# Altium PCB PCB1.PcbDoc
Units mm, origin at the board's own origin, x right, y up, seen from the top; angles counter-clockwise.
Board outline 43.18 x 67.82 mm, 2 copper layers (Top Layer, Bottom Layer); 45 components, 24 nets, 112 pads, 7 vias.
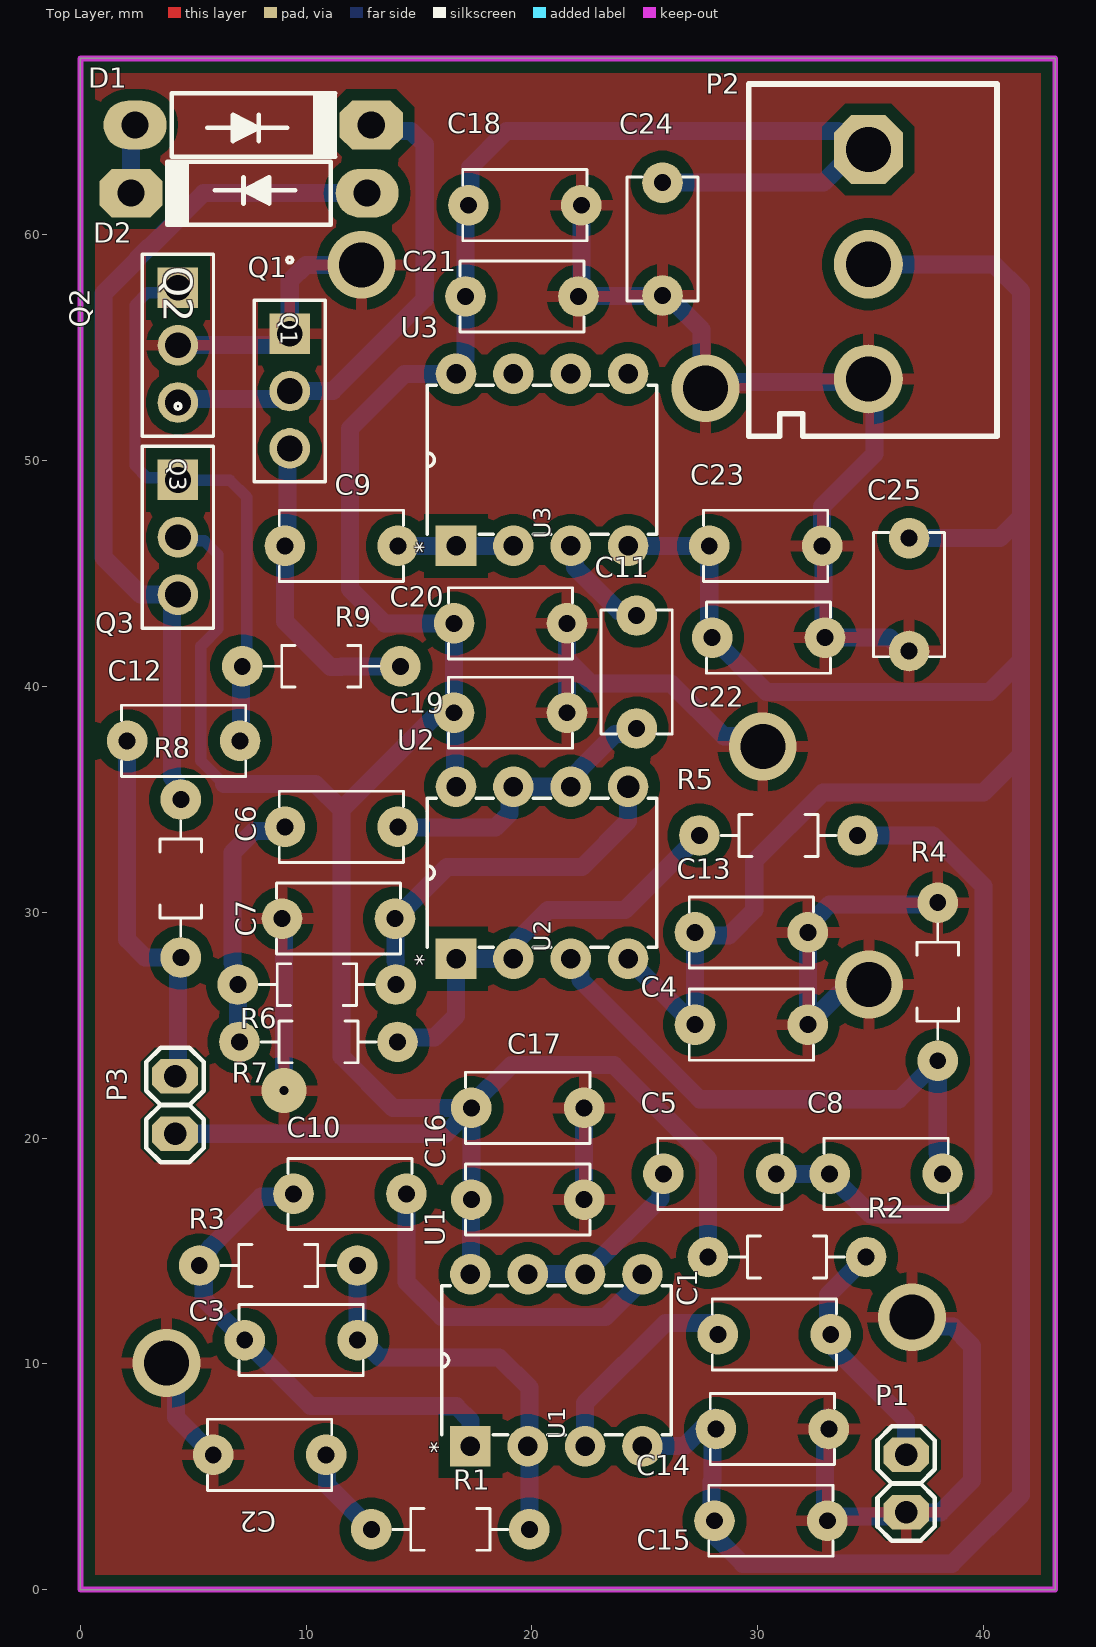
[diagram p0: Top Layer view]
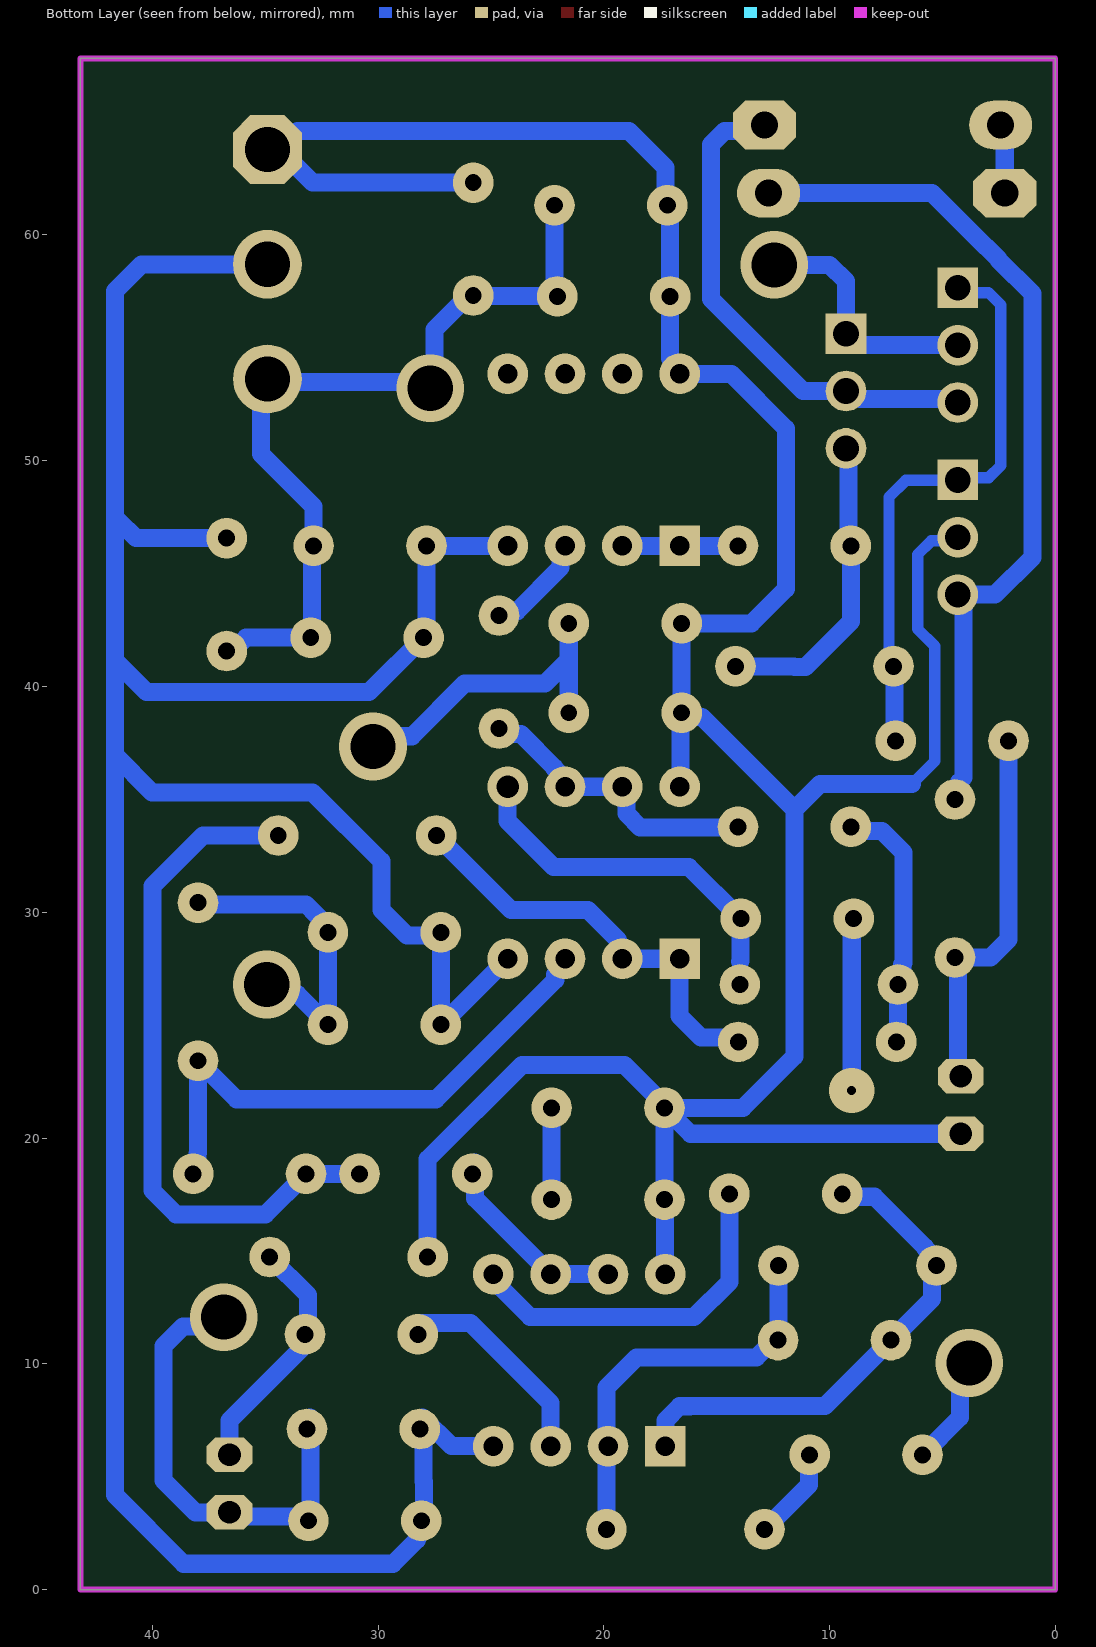
[diagram p1: Bottom Layer view, seen from below]

## Layer stack, top to bottom
Top Solder: solder mask 0.0102, Solder Resist, Dk 3.5
Top Layer: signal copper 0.0356
Dielectric 1: dielectric 0.32, FR-4, Dk 4.8
Bottom Layer: signal copper 0.0356
Bottom Solder: solder mask 0.0102, Solder Resist, Dk 3.5

## Board outline
0,0 0,67.818 43.18,67.818 43.18,0

## Design rules (kind name [scope] priority, off if disabled: settings)
Clearance Clearance_2 [InNamedPolygon('GND_POUR')] p1: gap=0.5 ignorepadtopadclearanceinfootprint=FALSE
Clearance [All] p2: gap=0.508 ignorepadtopadclearanceinfootprint=FALSE
PolygonConnect PolygonConnect_1 [All] p1: thpad.connectstyle=Relief thpad.reliefconductorwidth=0.5 thpad.reliefentries=4 thpad.polygonreliefangle="90 Angle" thpad.airgapwidth=0.5 smdpad.connectstyle=Relief smdpad.reliefconductorwidth=0.254 smdpad.reliefentries=4 smdpad.polygonreliefangle="90 Angle" smdpad.airgapwidth=0.254 via.connectstyle=Relief via.reliefconductorwidth=0.5 via.reliefentries=4 via.polygonreliefangle="90 Angle" via.airgapwidth=0.5
PolygonConnect [All] p2: connectstyle=Relief reliefconductorwidth=0.254 reliefentries=4 polygonreliefangle="90 Angle" airgapwidth=0.254
RoutingVias [All] p1: holewidth=0.711 width=1.27 viastyle="Through Hole" minholewidth=0.711 minwidth=1.27 maxholewidth=0.711 maxwidth=1.27
SolderMaskExpansion [All] p1: expansion=0.102 istentingtop=FALSE
SupplyNets "Schematic Supply Nets_2" [InNet('-12')] p1: voltage=0.000
SupplyNets "Schematic Supply Nets_1" [InNet('+12')] p2: voltage=0.000
SupplyNets "Schematic Supply Nets" [InNet('GND')] p3: voltage=0.000
Width [All] p1: maxlimit=1 minlimit=0.254 preferedwidth=0.508
30 further rules are at their usual default settings.

## Components (designator, comment, footprint, x,y, rotation, side; value= is the part's Value field where it differs from the comment)
C1 "Capacitor" CAP_RDE5C1H104J2K1H03B 30.734,11.303 r180 top value=10u
C2 "Capacitor" CAP_RDE5C1H104J2K1H03B 8.382,5.969 r0 top value=100u
C3 "Capacitor" CAP_RDE5C1H104J2K1H03B 9.779,11.049 r180 top value=100p
C4 "Capacitor" CAP_RDE5C1H104J2K1H03B 29.718,25.019 r0 top value=1u
C5 "Capacitor" CAP_RDE5C1H104J2K1H03B 28.321,18.415 r0 top value=1u
C6 "Capacitor" CAP_RDE5C1H104J2K1H03B 11.557,33.782 r0 top value=110n
C7 "Capacitor" CAP_RDE5C1H104J2K1H03B 11.43,29.718 r0 top value=56n
C8 "Capacitor" CAP_RDE5C1H104J2K1H03B 35.687,18.415 r0 top value=1u
C9 "Capacitor" CAP_RDE5C1H104J2K1H03B 11.557,46.228 r0 top value=47u
C10 "Capacitor" CAP_RDE5C1H104J2K1H03B 11.938,17.526 r180 top value=1u
C11 "Capacitor" CAP_RDE5C1H104J2K1H03B 24.638,40.64 r270 top value=2.2u
C12 "Capacitor" CAP_RDE5C1H104J2K1H03B 4.572,37.592 r180 top value=220u
C13 "Capacitor" CAP_RDE5C1H104J2K1H03B 29.718,29.108 r0 top value=1u
C14 "Capacitor" CAP_RDE5C1H104J2K1H03B 30.647,7.112 r180 top value=1u
C15 "Capacitor" CAP_RDE5C1H104J2K1H03B 30.582,3.048 r180 top value=1u
C16 "Capacitor" CAP_RDE5C1H104J2K1H03B 19.812,17.272 r180 top value=1u
C17 "Capacitor" CAP_RDE5C1H104J2K1H03B 19.812,21.336 r180 top value=1u
C18 "Capacitor" CAP_RDE5C1H104J2K1H03B 19.685,61.316 r180 top value=1u
C19 "Capacitor" CAP_RDE5C1H104J2K1H03B 19.05,38.837 r180 top value=1u
C20 "Capacitor" CAP_RDE5C1H104J2K1H03B 19.05,42.799 r180 top value=1u
C21 "Capacitor" CAP_RDE5C1H104J2K1H03B 19.558,57.277 r180 top value=1u
C22 "Capacitor" CAP_RDE5C1H104J2K1H03B 30.48,42.164 r180 top value=1u
C23 "Capacitor" CAP_RDE5C1H104J2K1H03B 30.353,46.228 r180 top value=1u
C24 "Capacitor" CAP_RDE5C1H104J2K1H03B 25.781,59.817 r270 top value=1u
C25 "Capacitor" CAP_RDE5C1H104J2K1H03B 36.703,44.069 r90 top value=1u
D1 "1N4007" My_DO41 7.62,64.77 r180 top
D2 "1N4007" My_DO41 7.5,61.951 r0 top
P1 "Header 2" My_1X02 36.576,3.429 r270 top
P2 "Header 3" My_CN3 34.912,58.661 r270 top
P3 "Header 2" My_1X02 4.191,20.193 r270 top
Q1 "BD139G" SOT-32_STM 9.271,55.626 r270 top
Q2 "BD14016STU" SOT-32_STM 4.318,57.658 r270 top
Q3 "BD139G" SOT-32_STM 4.318,49.149 r270 top
R1 "Resistor" RESAD700W45L350D185 16.383,2.667 r0 top value=1K
R2 "Resistor" RESAD700W45L350D185 31.298,14.732 r0 top value=10K
R3 "Resistor" RESAD700W45L350D185 8.763,14.351 r180 top value=100K
R4 "Resistor" RESAD700W45L350D185 37.973,26.924 r90 top value=22K
R5 "Resistor" RESAD700W45L350D185 30.917,33.401 r180 top value=10K
R6 "Resistor" RESAD700W45L350D185 10.47,26.797 r0 top value=10K
R7 "Resistor" RESAD700W45L350D185 10.541,24.257 r180 top value=10K
R8 "Resistor" RESAD700W45L350D185 4.445,31.496 r90 top value=1.2K
R9 "Resistor" RESAD700W45L350D185 10.668,40.894 r180 top value=100K
U1 "NE5532ANG" P8#1 24.892,13.97 r90 top
U2 "NE5532ANG" P8#2 24.257,35.56 r90 top
U3 "NE5532ANG" P8#1 24.257,53.848 r90 top

## Footprints (in the part's own frame and the unit in brackets; to place one, negate y for a bottom-side part, rotate by r counter-clockwise, add the part's x,y. Pads: shape width x height; smd on the part's side, far side on the other; paste and mask are expansions set on the pad)
CAP_RDE5C1H104J2K1H03B [mm]
  round 1.8 hole 0.75: 1(-2.5,0) 2(2.5,0)
  silkscreen extent -2.75,-1.58 2.75,1.58
My_1X02 [mil]
  oct 60x80 hole 39.37: 1(-100,0) 2(0,0)
  silkscreen extent -150,-50 50,50, body extent -150,-51 46,47, height 323
My_CN3 [mil]
  oct 120x120 hole 78.74: 1(-201.5,-0.5)
  round 120 hole 78.74: 2(-1.5,-0.5) 3(198.5,-0.5)
  silkscreen extent -316,-209 299,224, body extent -320,-214 302,227, height 721
My_DO41 [mil]
  oval 110x85 hole 47.24: A(204.71,-4)
  oct 110x85 hole 47.24: K(-207.1,-4)
  silkscreen extent -148,-59 141,51, body extent -228,-53 228,45, height 104
P8#1 [mm]
  rect 1.8x1.8 hole 0.864 paste-2539.97 mask-0.686: 1(-7.62,7.62)
  round 1.8 hole 0.864 paste-2539.97 mask-0.686: 2(-7.62,5.08) 3(-7.62,2.54) 4(-7.62,0) 5(0,0) 6(0,2.54) 7(0,5.08) 8(0,7.62)
  silkscreen extent -7.11,-1.27 -0.51,8.89, body extent -7.75,-1.27 0.38,8.89, height 5.21
P8#2 [mm]
  rect 1.8x1.8 hole 0.864 paste-2539.97 mask-0.686: 1(-7.62,7.62)
  round 1.8 hole 0.864 paste-2539.97 mask-0.686: 2(-7.62,5.08) 3(-7.62,2.54) 4(-7.62,0) 6(0,2.54) 7(0,5.08) 8(0,7.62)
  round 1.8 hole 1 paste-2539.97 mask-0.686: 5(0,0)
  silkscreen extent -7.11,-1.27 -0.51,8.89, body extent -7.75,-1.27 0.38,8.89, height 5.21
RESAD700W45L350D185 [mm]
  round 1.8 hole 0.75: 1(-3.5,0) 2(3.5,0)
  silkscreen extent -2.55,-0.92 2.55,0.92, body extent -3.72,-0.92 3.72,0.92, height 1.84
SOT-32_STM [mm]
  rect 1.8x1.8 hole 1.143 paste-2539.97 mask+0: 1(0,0)
  round 1.8 hole 1.143 paste-2539.97 mask+0: 2(2.54,0) 3(5.08,0)
  silkscreen extent -3.39,-1.57 6.57,1.57, body extent -1.36,-1.45 6.44,1.45, height 8.89

## Part data
D1 D2: "1 Amp Diode", ASiD Part Number=1n4007-AS
P1 P3: "Header, 2-Pin", ASiD Part Number="Header 2-AS"
P2: "Header, 3-Pin", ASiD Part Number="Header 3-AS"
Q1 Q2 Q3 U1 U2 U3: "No Description Available", Manufacturer_Name=onsemi, Copyright="Copyright (C) 2026 Ultra Librarian. All rights reserved."
  Q1 Q3: Manufacturer_Part_Number=BD139G
  Q2: Manufacturer_Part_Number=BD14016STU
  U1 U2 U3: Manufacturer_Part_Number=NE5532ANG, RefDes=RefDes, Type=Type
C1 C2 C3 C4 C5 C6 C7 C8 C9 C10 C11 C12 C13 C14 C15 C16 C17 C18 C19 C20 C21 C22 C23 C24 C25: SimulationGenericComponent=True
R1 R2 R3 R4 R5 R6 R7 R8 R9: SimulationGenericComponent=True, TC1=0, TC2=0

## Via types
v1: diameter 3, hole 2, Top Layer to Bottom Layer, 6 vias
v2: diameter 2, hole 0.4, Top Layer to Bottom Layer, 1 vias

## Nets (pads, with @x,y where several pads share a name; then routed paths per layer and width w, separated by ;. In a path a pad name is that pad's centre, name@x,y a point inside that pad or via, vN(x,y) a via of type N, cw(c..) or ccw(c..) an arc to the next point about the centre after c; other vN are vias at no path point)
+12: C16.2 C17.2 C18.2 C19.2 C20.2 C21.2 C24.1 P2.1 P3.2 Q3.2 R2.1 U1.8 U2.8 U3.8 | length 143.9
  Bottom Layer w0.5: Q3.2 4.477,46.45 5.493,46.45 6.096,45.847 6.096,42.545 5.334,41.783 5.334,36.703 6.35,35.687
  Bottom Layer w0.8: P3.2@4.195,20.189 16.165,20.189 C17.2 ; 6.35,35.687 10.414,35.687 11.557,34.544 ; U2.8@16.593,35.604 16.593,38.793 C19.2 ; C17.2@17.215,21.366 19.09,23.241 23.622,23.241 27.798,19.065 R2.1 ; U1.8 17.292,13.99 C16.2@17.292,17.252 ; C16.2 C17.2 ; C24.1@25.4,62.317 C24.1 32.91,62.317 34.372,63.779 P2.1 ; P2.1@34.081,64.598 33.859,64.376 33.776,64.376 33.554,64.598 18.878,64.598 17.266,62.986 17.266,61.396 C18.2 17.058,61.189 C21.2 17.058,54.54 16.637,54.119 U3.8 14.351,53.848 11.938,51.435 11.938,44.323 13.462,42.799 C20.2 C19.2 ; 11.557,34.544 15.658,38.645 16.359,38.645 C19.2 ; 11.557,34.544 11.557,23.622 13.843,21.336 C17.2
-12: C4.1 C13.1 C14.2 C15.2 C22.2 C23.2 C25.2 P2.2 U1.4 U2.4 U3.4 | length 139.5
  Bottom Layer w0.8: U2.4 26.688,25.509 C4.1@27.218,25.509 ; U3.4 24.27,46.215 C23.2@27.853,46.215 ; U1.4 26.75,6.35 C14.2@28.02,7.62 ; C4.1 C4.1@27.218,25.509 ; C23.2 C23.2@27.853,46.215 ; C15.2@27.955,3.556 27.955,4.779 27.987,4.779 C14.2@27.987,7.587 ; C15.2 28.273,2.857 28.273,2.207 29.337,1.143 38.608,1.143 41.656,4.191 41.656,36.957 ; P2.2 40.469,58.699 41.656,57.513 41.656,47.371 41.656,41.148 ; C25.2 40.727,46.569 41.529,47.371 ; C4.1@27.218,25.509 C13.1 27.351,28.975 28.721,28.975 29.845,30.099 29.845,32.258 32.893,35.306 40.005,35.306 41.656,36.957 ; C23.2@27.853,46.215 27.853,42.291 30.393,39.751 40.259,39.751 41.656,41.148 ; 41.656,36.957 41.656,41.148
GND: C2.1 C4.2 C7.1 C13.2 C14.1 C15.1 C16.1 C17.1 C18.1 C19.1 C20.1 C21.1 C22.1 C23.1 C24.2 C25.1 P1.2 P2.3 Q1.1 Q2.2 R4.2 | length 114.2
  Bottom Layer w0.8: v1(3.81,10.033) 4.231,9.612 4.231,7.62 C2.1 ; Q2.2 8.763,55.118 Q1.1 9.271,57.951 9.994,58.674 v1(12.446,58.674) ; C7.1 9.017,29.631 v2(9.017,22.098) ; C19.1 21.55,41.188 ; C20.1 21.55,41.188 ; C21.1 22.185,57.404 C18.1 ; C16.1@22.185,17.272 C16.1@22.185,17.574 ; C21.1@22.185,57.297 25.38,57.297 25.39,57.307 C24.2@25.41,57.307 ; C16.1 C17.1 ; C24.2@25.4,57.317 25.995,57.317 27.504,55.808 27.504,53.395 v1(27.686,53.213) 27.953,53.48 34.658,53.48 34.849,53.67 P2.3 35.179,53.34 35.179,50.292 32.853,47.966 C23.1 ; v1(30.226,37.338) 29.77,37.794 28.5,37.794 26.162,40.132 22.606,40.132 21.55,41.188 ; C23.1@32.766,46.315 C23.1 ; C15.1@32.987,3.589 32.987,7.587 C14.1@33.02,7.62 ; C15.1 33.273,3.239 P1.2@36.386,3.239 ; v1@35.593,26.67 35.299,26.376 33.575,26.376 C4.2 32.218,29.551 32.39,29.551 32.718,29.879 32.718,29.884 33.187,30.353 R4.2@38.416,30.353 ; P1.2 36.591,3.414 38.085,3.414 39.497,4.826 39.497,10.795 38.638,11.654 37.241,11.654 v1(36.83,12.065) ; C25.1 36.432,41.569 35.837,42.164 C22.1 32.917,42.227 32.917,46.164 C23.1
  other v1: 34.925,26.797
NetC1_1: C1.1 P1.1 R2.2 | length 10.9
  Bottom Layer w0.8: R2.2 33.107,13.041 33.107,11.765 33.252,11.62 33.298,11.62 33.298,10.771 36.576,7.493 P1.1
NetC1_2: C1.2 U1.3 | length 9.1
  Bottom Layer w0.8: U1.3 22.352,8.255 25.908,11.811 C1.2@28.107,11.811
NetC2_2: C2.2 R1.1 | length 4.1
  Bottom Layer w0.8: C2.2 10.916,5.935 10.916,4.634 R1.1
NetC3_1: C3.1 R1.2 R3.1 U1.2 | length 18
  Bottom Layer w0.8: C3.1@12.263,11.065 R3.1 ; C3.1 12.486,11.049 13.248,10.287 18.542,10.287 19.883,8.946 R1.2
NetC3_2: C3.2 C10.2 R3.2 U1.1 | length 22.3
  Bottom Layer w0.8: C10.2@9.305,17.663 9.04,17.399 8.001,17.399 5.763,15.161 5.763,15.122 5.263,14.622 5.263,14.08 5.461,13.882 5.461,12.867 10.2,8.128 16.176,8.128 16.184,8.12 16.645,8.12 17.272,7.493 U1.1
NetC5_1: C5.1 U1.6 U1.7 | length 8.9
  Bottom Layer w0.8: U1.7 U1.6 22.352,13.987 25.694,17.329 C5.1@25.694,18.923
NetC5_2: C5.2 C8.1 R5.1 | length 30.6
  Bottom Layer w0.8: C5.2 C8.1 34.995,16.607 38.936,16.607 39.995,17.666 39.995,31.164 37.758,33.401 R5.1 R5.1@34.168,33.401
NetC6_1: C6.1 R6.1 R7.2 | length 11
  Bottom Layer w0.8: R6.1@6.779,26.988 6.779,27.695 6.731,27.743 6.731,32.639 7.683,33.591 8.866,33.591 C6.1 ; R6.1 6.97,24.328 R7.2
NetC6_2: C6.2 C11.2 U2.6 U2.7 | length 13.4
  Bottom Layer w0.8: C6.2@14.087,33.752 18.388,33.752 19.002,34.365 19.002,35.385 U2.7 U2.6 ; U2.6@21.884,35.56 U2.6 ; C11.2 24.391,37.893 23.669,37.893 22.194,36.418 22.194,36.386 21.717,35.91 U2.6
NetC7_2: C7.2 R6.2 U2.5 | length 15.5
  Bottom Layer w0.8: 13.97,27.813 13.95,27.833 13.95,29.718 16.236,32.004 22.225,32.004 24.257,34.036 U2.5
NetC8_2: C8.2 R4.1 U2.3 | length 24.9
  Bottom Layer w0.8: U2.3 21.717,27.669 22.148,27.238 22.148,27.001 27.432,21.717 36.266,21.717 R4.1 37.973,19.336 37.996,19.313 37.996,18.606 C8.2
NetC9_1: C9.1 Q1.3 R9.1 | length 13.7
  Bottom Layer w0.8: Q1.3 9.164,50.439 9.164,46.335 C9.1 9.057,42.886 11.071,40.872 11.551,40.872 11.573,40.894 R9.1
NetC9_2: C9.2 U3.1 U3.2 | length 5.1
  Bottom Layer w0.8: C9.2 U3.1 U3.2
NetC10_1: C10.1 U1.5 | length 15.9
  Bottom Layer w0.8: C10.1 14.438,13.629 16.002,12.065 23.258,12.065 24.892,13.699 U1.5
NetC11_1: C11.1 U3.3 | length 4.6
  Bottom Layer w0.8: U3.3 21.908,46.037 21.908,45.275 23.852,43.331 24.447,43.331 C11.1
NetC12_1: C12.1 Q2.1 Q3.1 R9.2 | length 25.9
  Bottom Layer w0.5: Q3.1 4.224,49.243 2.954,49.243 2.413,49.784 2.413,56.896 2.961,57.444 4.104,57.444 Q2.1 ; Q3.1@4.318,49.169 5.06,49.169 5.1,49.129 6.624,49.129 7.366,48.387 7.366,41.092 R9.2 ; C12.1 C12.1@7.12,37.64
  Bottom Layer w0.8: C12.1@7.12,37.64 R9.2@7.12,41.049
NetC12_2: C12.2 P3.1 R8.1 | length 16.9
  Bottom Layer w0.8: C12.2 2.072,28.789 2.865,27.996 R8.1 4.318,27.869 4.318,22.86 P3.1
NetD1_A: D1.A D2.K | length 3.1
  Bottom Layer w0.508: D1.A@2.24,64.691 D1.A
  Bottom Layer w0.8: D2.K D1.A@2.24,64.691
NetD1_K: D1.K Q1.2 Q2.3 | length 21.9
  Bottom Layer w0.8: Q2.3@4.753,52.742 8.657,52.742 9,53.086 11.176,53.086 15.25,57.16 15.25,63.998 14.645,64.603 13.149,64.603 D1.K
NetD2_A: D2.A Q3.3 R8.2 | length 38.6
  Bottom Layer w0.8: R8.2 4.254,35.187 4.254,35.775 4.064,35.965 4.064,43.544 4.318,43.798 Q3.3 2.667,44.069 1.016,45.72 1.016,57.404 2.51,58.898 2.51,58.934 3.042,59.466 3.078,59.466 5.461,61.849 D2.A
NetR5_2: R5.2 R7.1 U2.1 U2.2 | length 19.2
  Bottom Layer w0.8: R7.1 14.232,24.448 15.685,24.448 16.637,25.4 U2.1 18.923,27.94 U2.2@19.367,27.94 ; U2.2 19.368,28.131 19.368,28.766 20.701,30.099 24.115,30.099 R5.2
pads on no net: U3.5 U3.6 U3.7

## Polygon pours and split planes (outlines as drawn)
GND on Top Layer "GND_L01_P000" (solid, pour order 0): 0,0 0,67.818 43.18,67.818 43.18,0

## Keep-outs
Keep-Out Layer:
  the board outline again, w0.254

## Text inside footprints (layer, text, board x,y; h text height)
Q1: Mechanical 13 "TAB" at 9.639,53.562 h0.64 r270
Q2: Mechanical 13 "TAB" at 4.686,55.594 h0.64 r270
Q3: Mechanical 13 "TAB" at 4.686,47.085 h0.64 r270
U1: Top Overlay "*" at 16.459,6.032 h1.27 r90; Mechanical 13 "*" at 16.459,6.032 h1.27 r90
U2: Top Overlay "*" at 15.824,27.622 h1.27 r90; Mechanical 13 "*" at 15.824,27.622 h1.27 r90
U3: Top Overlay "*" at 15.824,45.91 h1.27 r90; Mechanical 13 "*" at 15.824,45.91 h1.27 r90